# Altium PCB 24Power.PcbDoc
Units mm, origin at the board's own origin, x right, y up, seen from the top; angles counter-clockwise.
Board outline 42.58 x 26.69 mm, 2 copper layers (Top Layer, Bottom Layer); 2 components, 3 nets, 25 pads, 0 vias.
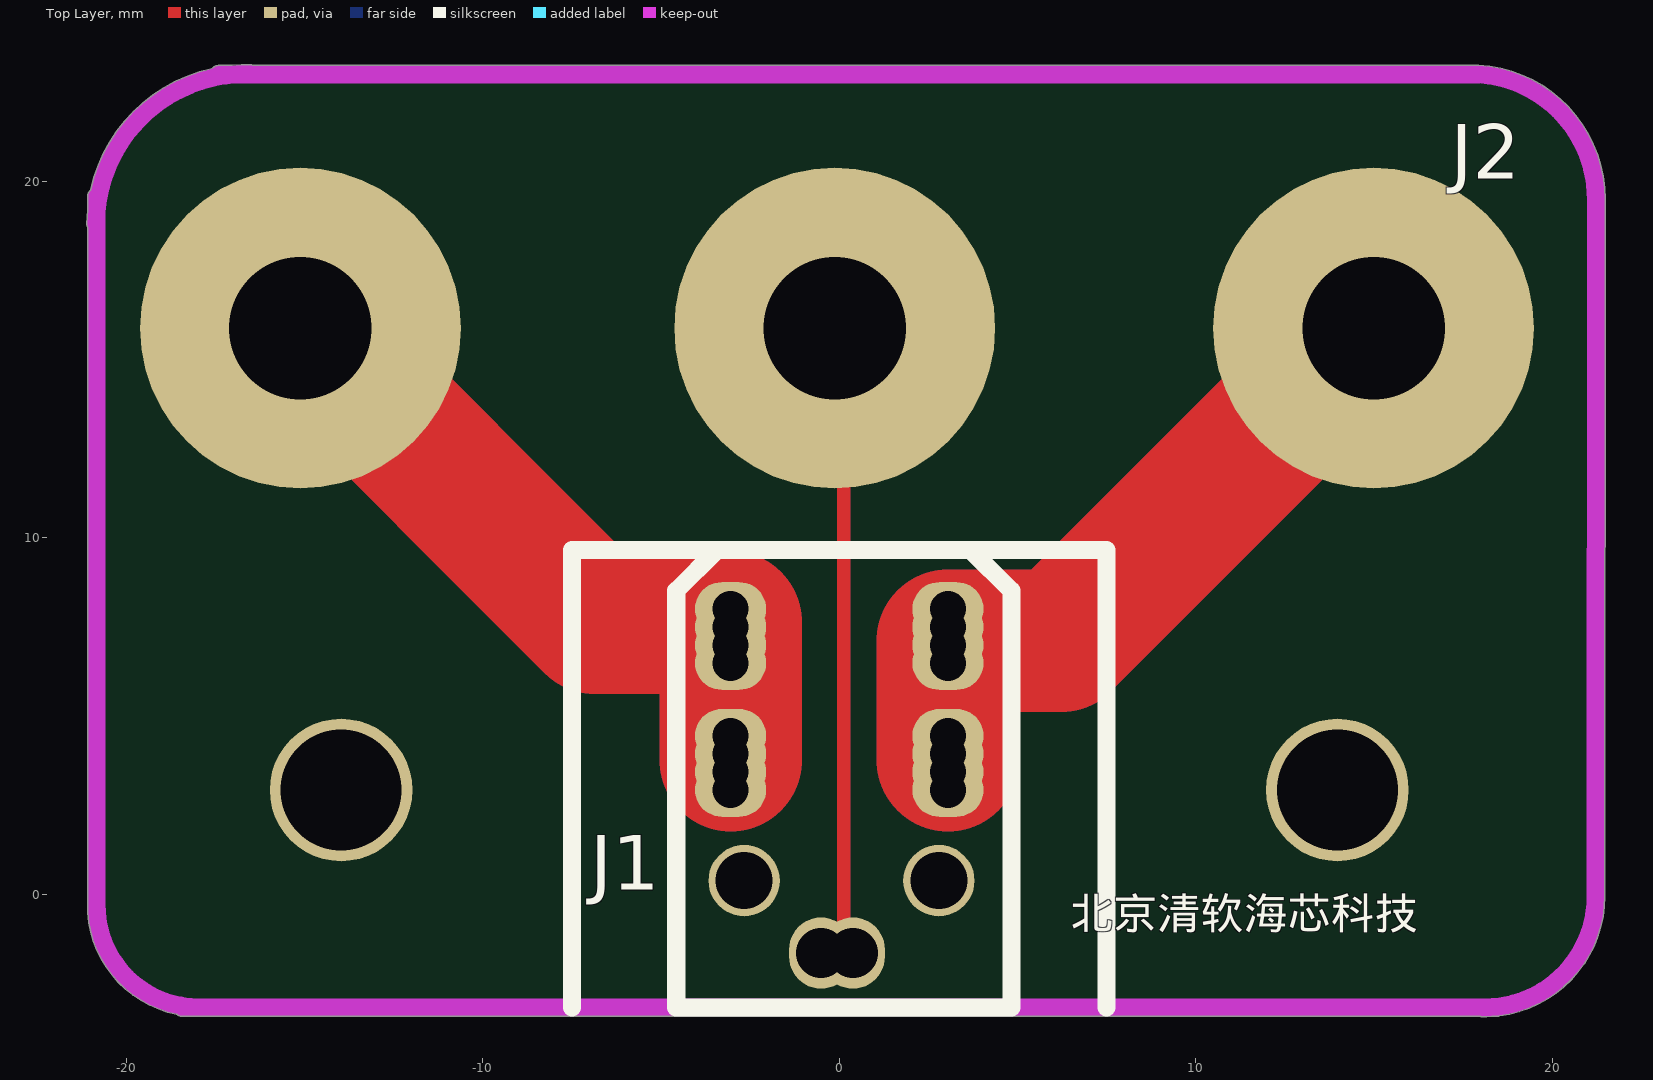
[diagram p0: Top Layer view]
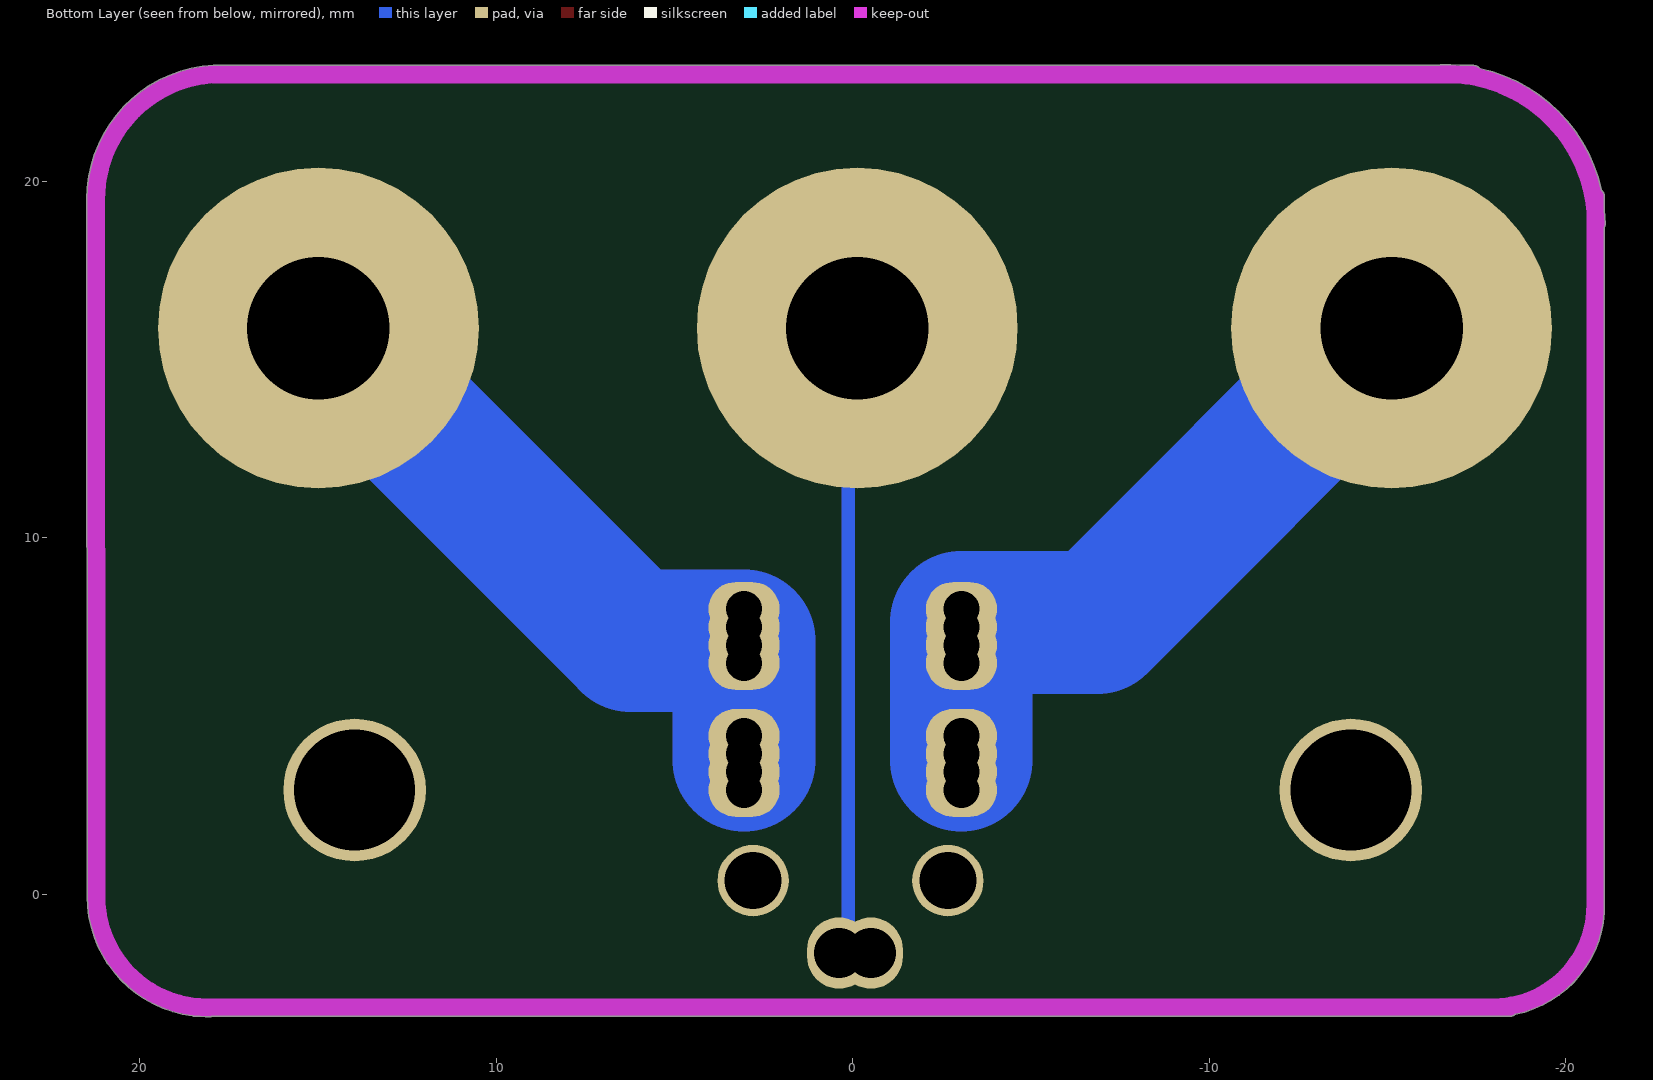
[diagram p1: Bottom Layer view, seen from below]

## Layer stack, top to bottom
Top Solder: solder mask 0.0102, Solder Resist, Dk 3.5
Top Layer: signal copper 0.0356
Dielectric 1: dielectric 0.32, FR-4, Dk 4.8
Bottom Layer: signal copper 0.0356
Bottom Solder: solder mask 0.0102, Solder Resist, Dk 3.5

## Board outline
-21.082,-0.251 ccw(c-17.97,-0.318) -18.578,-3.37 ccw(c-18.415,-3.175) -18.415,-3.429 -18.037,-3.429 ccw(c-17.97,-0.318) -17.904,-3.429 17.983,-3.429 ccw(c18.034,-3.18) 18.029,-3.435 ccw(c18.098,-0.064) 18.296,-3.429 18.415,-3.429 ccw(c18.415,-3.175) 18.514,-3.409 ccw(c18.098,-0.064) 21.469,-0.064 ccw(c18.098,-0.064) 21.469,0.003 21.477,19.428 ccw(c17.716,19.494) 21.478,19.494 ccw(c17.716,19.494) 17.921,23.25 ccw(c17.907,22.996) 17.84,23.241 -16.422,23.241 ccw(c-16.51,23.002) -16.502,23.257 ccw(c-16.637,18.796) -17.029,23.241 -17.399,23.241 ccw(c-17.399,22.987) -17.589,23.156 ccw(c-16.637,18.796) -20.997,19.748 ccw(c-20.828,19.558) -21.082,19.558 -21.082,19.188 ccw(c-16.637,18.796) -21.1,18.796 ccw(c-20.845,18.796) -21.082,18.704

## Design rules (kind name [scope] priority, off if disabled: settings)
Clearance [All] p1: gap=0.254
PolygonConnect [All] p1: connectstyle=Relief reliefconductorwidth=0.254 reliefentries=4 polygonreliefangle="90 Angle" airgapwidth=0.254
RoutingVias [All] p1: holewidth=0.711 width=1.27 viastyle="Through Hole" minholewidth=0.711 minwidth=1.27 maxholewidth=0.711 maxwidth=1.27
SolderMaskExpansion [All] p1: expansion=0.102
Width [All] p1: maxlimit=5 minlimit=0.254 preferedwidth=0.254
30 further rules are at their usual default settings.

## Components (designator, comment, footprint, x,y, rotation, side; value= is the part's Value field where it differs from the comment)
J1 "24VPower" 24VPower 0,-1.778 r0 top
J2 "CON3" 24PowerB -15.113,15.875 r0 top

## Footprints (in the part's own frame and the unit in brackets; to place one, negate y for a bottom-side part, rotate by r counter-clockwise, add the part's x,y. Pads: shape width x height; smd on the part's side, far side on the other; paste and mask are expansions set on the pad)
24PowerB [mm]
  round 9 hole 4: 1(0,0) 2(14.986,0) 3(30.099,0)
24VPower [mm]
  oval 1.8x2 hole 1.4: 0(-0.508,0.127) 0(0.381,0.127)
  oval 2x1.5 hole 1: 1(-3.048,8.255) 1(-3.048,8.763) 1(-3.048,9.271) 1(-3.048,9.779) 2(-3.048,4.699) 2(-3.048,5.207) 2(-3.048,5.715) 2(-3.048,6.223) 3(3.048,8.255) 3(3.048,8.763) 3(3.048,9.271) 3(3.048,9.779) 4(3.048,4.699) 4(3.048,5.207) 4(3.048,5.715) 4(3.048,6.223)
  round 2 hole 1.6: 5(-2.667,2.159) 6(2.794,2.159)
  silkscreen extent -4.57,-1.4 4.83,11.43

## Free pads (board coordinates)
  round 4 hole 3.4: 4(13.97,2.921) 5(-13.97,2.921)

## Nets (pads, with @x,y where several pads share a name; then routed paths per layer and width w, separated by ;. In a path a pad name is that pad's centre, name@x,y a point inside that pad or via, vN(x,y) a via of type N, cw(c..) or ccw(c..) an arc to the next point about the centre after c; other vN are vias at no path point)
0V: J1.3 J1.4 J2.3 | length 37.8
  Top Layer w4: J1.4@3.048,3.762 3.048,4.064 3.048,4.572 3.048,6.604 3.048,7.112 6.223,7.112 J2.3
  Bottom Layer w4: J1.4@3.048,3.762 3.048,4.064 3.048,4.572 3.048,6.604 3.048,7.112 6.223,7.112 J2.3
+24V: J1.1 J1.2 J2.1 | length 38.7
  Top Layer w4: J2.1 -6.858,7.62 -3.048,7.62 -3.048,7.112 -3.048,6.604 -3.048,4.572 -3.048,4.064 J1.2@-3.048,3.762
  Bottom Layer w4: J2.1 -6.858,7.62 -3.048,7.62 -3.048,7.112 -3.048,6.604 -3.048,4.572 -3.048,4.064 J1.2@-3.048,3.762
LOW: J1.0 J2.2 | length 35.5
  Top Layer w0.381: J2.2 0.127,15.621 0.127,-1.397 J1.0@0.381,-1.651
  Bottom Layer w0.381: J2.2 0.127,15.621 0.127,-1.397 J1.0@0.381,-1.651
pads on no net: J1.5 J1.6

## Keep-outs
Keep-Out Layer:
  lines w0.508: -20.845,18.796 cw(c-16.637,18.796) -16.51,23.002 ; -20.828,19.558 -20.828,-0.254 ccw(c-17.97,-0.318) -17.907,-3.175 ; -18.415,-3.175 18.415,-3.175 ; -17.399,22.987 17.907,22.987 ; 17.907,22.996 cw(c17.716,19.494) 21.223,19.431 21.214,0 cw(c18.098,-0.064) 18.034,-3.18

## Silkscreen, mask and mechanical layers (free items; w line width, h text height)
Top Overlay:
  lines w0.508: -7.493,-3.175 -7.493,9.652 7.493,9.652 7.493,-3.175
  text "北京清软海芯科技" at 6.477,-1.27 h1.52